# Altium PCB Arduino_MEGA_2560-Rev3.PcbDoc (part 1 of 2)
Units mil, origin at the board's own origin, x right, y up, seen from the top; angles counter-clockwise.
Board outline 4000 x 2100 mil, 2 copper layers (Top, Bottom); 63 components, 112 nets, 394 pads, 154 vias.
Unrouted connection lines stored in the file: 2.
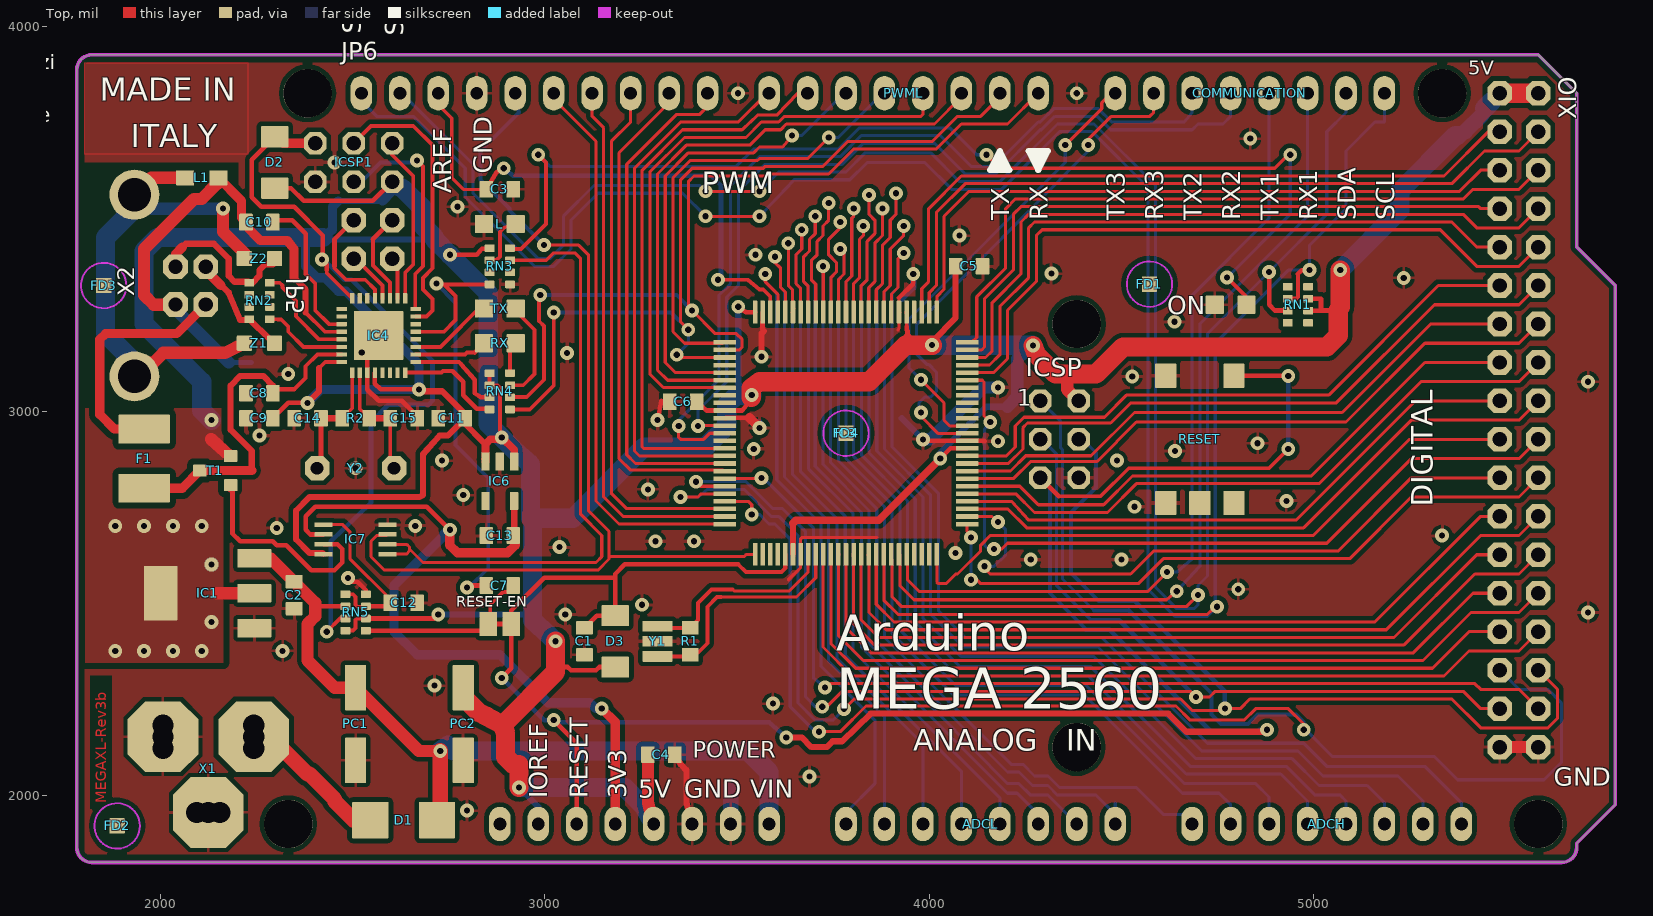
[diagram p0: Top view]
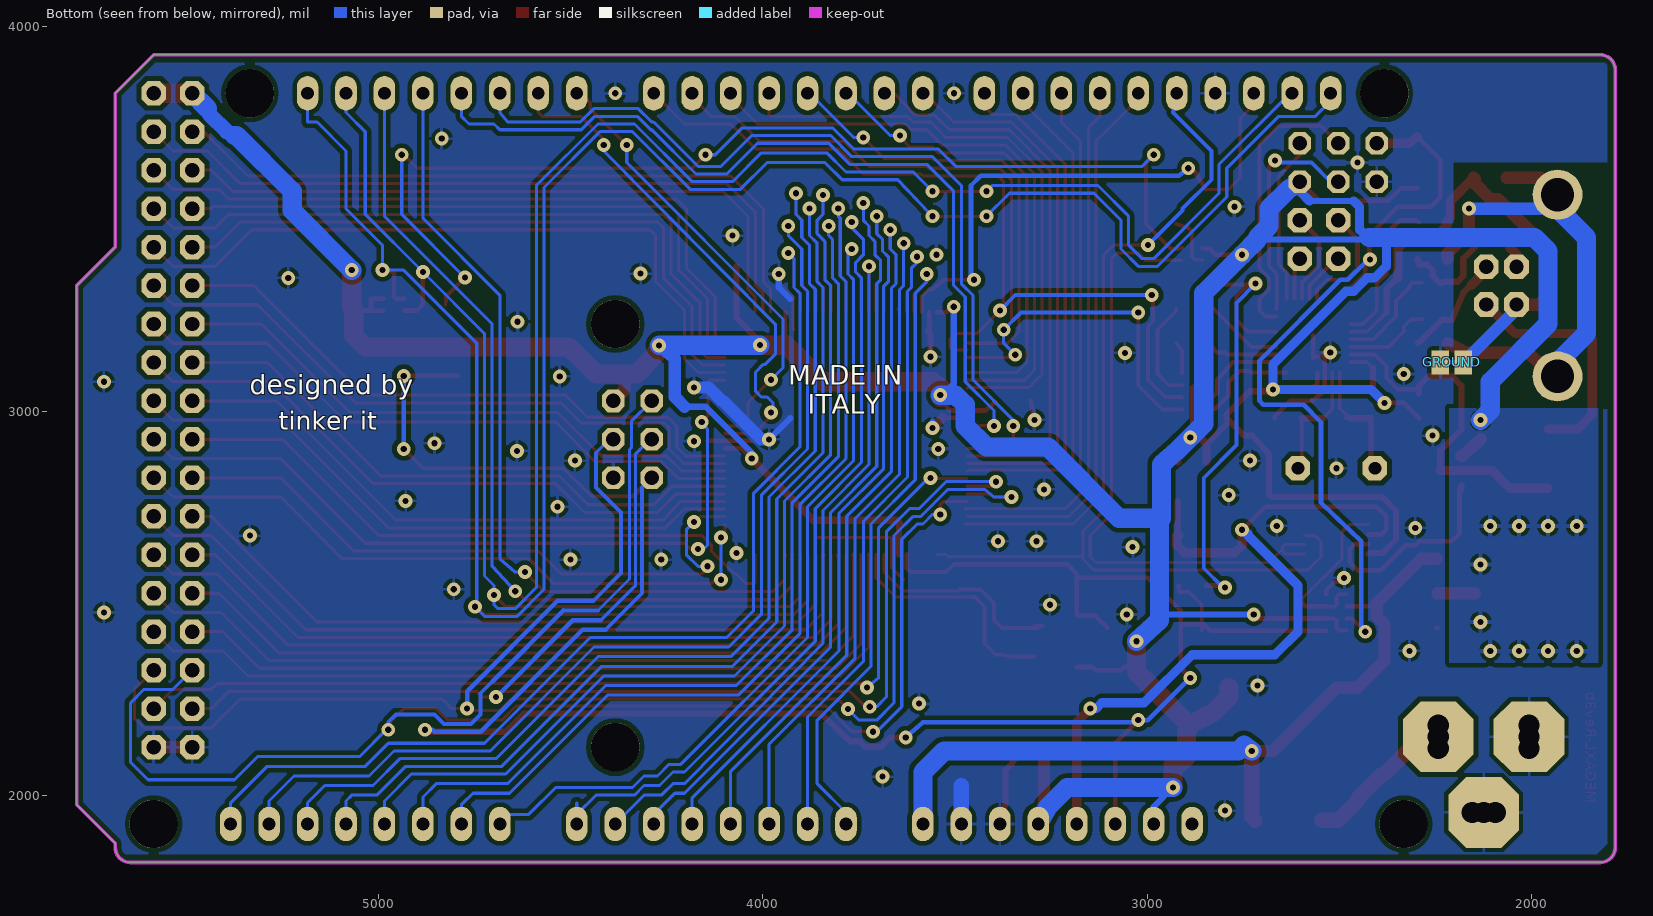
[diagram p1: Bottom view, seen from below]

## Layer stack, top to bottom
Top Solder: solder mask 0.4, Solder Resist, Dk 3.5
Top: signal copper 1.378
Dielectric 1: dielectric 12.6, FR-4, Dk 4.8
Bottom: signal copper 1.378
Bottom Solder: solder mask 0.4, Solder Resist, Dk 3.5

## Board outline
1822.83,3926.77 5583.46,3926.77 5683.46,3826.77 5683.46,3426.77 5783.46,3326.77 5783.46,1976.77 5683.46,1876.77 5683.46,1866.14 cw(c5644.09,1866.14) 5644.09,1826.77 1822.83,1826.77 cw(c1822.83,1866.14) 1783.46,1866.14 1783.46,3887.4 cw(c1822.83,3887.4)

## Design rules (kind name [scope] priority, off if disabled: settings)
Clearance Clearance_for_PolygonClass_Isolate_16 [InPolygonClass('Isolate_16')] p1: gap=0 ignorepadtopadclearanceinfootprint=FALSE except(16: Arc-Poly Track-Poly SMDPad-Poly THPad-Poly Via-Poly Fill-Poly Poly-Poly Poly-Region Poly-Text Poly-Hole)
Clearance Clearance_for_PolygonClass_Isolate_12 [InPolygonClass('Isolate_12')] p2: gap=0 ignorepadtopadclearanceinfootprint=FALSE except(12: Arc-Poly Track-Poly SMDPad-Poly THPad-Poly Via-Poly Fill-Poly Poly-Poly Poly-Region Poly-Text Poly-Hole)
Clearance "Clearance (Same Net)" [All] p3: gap=7 ignorepadtopadclearanceinfootprint=FALSE except(8: Track-Via THPad-THPad; 10: Via-Via; 12: THPad-Via)
Clearance "Clearance_for_NetClass_power usb" [InNetClass('power usb') vs InNetClass('power usb')] p4: gap=8 ignorepadtopadclearanceinfootprint=FALSE
Clearance Clearance_for_NetClass_gnd [InNetClass('gnd') vs InNetClass('gnd')] p5: gap=8 ignorepadtopadclearanceinfootprint=FALSE
Clearance Clearance_for_NetClass_power [InNetClass('power') vs InNetClass('power')] p6: gap=8 ignorepadtopadclearanceinfootprint=FALSE
Clearance [All] p7: gap=7 ignorepadtopadclearanceinfootprint=FALSE except(8: Track-Via THPad-THPad; 10: Via-Via; 12: THPad-Via)
HoleSize "HoleSize_For_NetClass_power usb" [InNetClass('power usb')] p1: absolutevalues=TRUE maxlimit=16 minlimit=16 maxpercent=80.000 minpercent=20.000
HoleSize HoleSize_For_NetClass_gnd [InNetClass('gnd')] p2: absolutevalues=TRUE maxlimit=16 minlimit=16 maxpercent=80.000 minpercent=20.000
HoleSize HoleSize_For_NetClass_power [InNetClass('power')] p3: absolutevalues=TRUE maxlimit=16 minlimit=16 maxpercent=80.000 minpercent=20.000
HoleSize [All] p4: absolutevalues=TRUE maxlimit=100000 minlimit=16 maxpercent=80.000 minpercent=20.000
HoleToHoleClearance mdDrill [All] p1: gap=12 allowstackedmicrovias=TRUE
PasteMaskExpansion Expansion_SMDPaste_OFF [InPadClass('SMDPaste_OFF')] p1: expansion=0
PasteMaskExpansion mlMinCreamFrame [All] p2: expansion=-2
PolygonConnect PolygonConnect_For_PolygonThermal_ON_Width80000_Gap100000 [InPolygonClass('PolygonThermal_ON_Width80000_Gap100000')] p1: connectstyle=Relief reliefconductorwidth=8 reliefentries=4 polygonreliefangle="90 Angle" airgapwidth=10
PolygonConnect PolygonConnect_For_PolygonThermal_ON_Width120000_Gap100000 [InPolygonClass('PolygonThermal_ON_Width120000_Gap100000')] p2: connectstyle=Relief reliefconductorwidth=12 reliefentries=4 polygonreliefangle="90 Angle" airgapwidth=10
PolygonConnect PolygonConnect_For_PolygonThermal_OFF [InPolygonClass('PolygonThermal_OFF')] p3: connectstyle=Direct reliefconductorwidth=10 reliefentries=4 polygonreliefangle="90 Angle" airgapwidth=10
PolygonConnect ThermalVias [IsVia] p4: connectstyle=Direct reliefconductorwidth=10 reliefentries=4 polygonreliefangle="90 Angle" airgapwidth=10
PolygonConnect [All] p5: connectstyle=Relief reliefconductorwidth=10 reliefentries=4 polygonreliefangle="90 Angle" airgapwidth=10
RoutingVias [All] p1: holewidth=16 width=36 viastyle="Through Hole" minholewidth=16 minwidth=36 maxholewidth=100 maxwidth=100
SolderMaskExpansion Expansion_SMDSolder_OFF [InPadClass('SMDSolder_OFF')] p1: expansion=0
SolderMaskExpansion mlMinStopFrame [All] p2: expansion=2
Width "Width_For_NetClass_power usb" [InNetClass('power usb')] p1: maxlimit=40 minlimit=10 preferedwidth=20
Width Width_For_NetClass_gnd [InNetClass('gnd')] p2: maxlimit=24 minlimit=10 preferedwidth=12
Width Width_For_NetClass_power [InNetClass('power')] p3: maxlimit=48 minlimit=10 preferedwidth=24
Width [All] p4: maxlimit=10000 minlimit=8 preferedwidth=8
27 further rules are at their usual default settings.

## Classes and differential pairs
polygon class PolygonThermal_ON_Width80000_Gap100000: Polygon_1_Net_GND Polygon_1_Net_N$1 Polygon_2_Net_GND
polygon class PolygonThermal_ON_Width120000_Gap100000: Polygon_2_Net_+5V
polygon class PolygonThermal_OFF: Polygon_1_Net_+5V
polygon class Isolate_16: Polygon_1_Net_+5V
polygon class Isolate_12: Polygon_1_Net_GND Polygon_2_Net_GND
pad class SMDSolder_OFF: IC4-33
pad class SMDPaste_OFF: IC4-33 RESET-5
net class "power usb": +5V USBVCC XVCC
net class gnd: GND UGND USHIELD
net class power: +3V3 PWRIN VIN

## Components (designator, comment, footprint, x,y, rotation, side; value= is the part's Value field where it differs from the comment)
ADCH "8x1F-H8.5" 1X08 5033.46,1926.77 r0 top
ADCL "8x1F-H8.5" 1X08 4133.46,1926.77 r0 top
C1 "22p" C0603-ROUND 3103.46,2401.77 r270 top
C2 "100n" C0603-ROUND 2348.46,2521.77 r270 top
C3 "100n" C0603-ROUND 2883.46,3576.77 r0 top
C4 "100n" C0603-ROUND 3303.46,2106.77 r0 top
C5 "100n" C0603-ROUND 4103.46,3376.77 r0 top
C6 "100n" C0603-ROUND 3360.03,3024.37 r180 top
C7 "100n" C0603-ROUND 2883.46,2546.77 r0 top
C8 "100n" C0603-ROUND 2258.46,3046.77 r180 top
C9 "100n" C0603-ROUND 2258.46,2981.77 r180 top
C10 "1u" C0603-ROUND 2258.46,3491.77 r180 top
C11 "100n" C0603-ROUND 2758.46,2981.77 r0 top
C12 "100n" C0603-ROUND 2633.46,2501.77 r180 top
C13 "1u" C0603-ROUND 2883.46,2676.77 r0 top
C14 "22p" C0603-ROUND 2383.46,2981.77 r180 top
C15 "22p" C0603-ROUND 2633.46,2981.77 r0 top
COMMUNICATION "8x1F-H8.5" 1X08 4833.46,3826.77 r180 top
D1 "M7" SMB 2633.46,1936.77 r180 top
D2 "CD1206-S01575" MINIMELF 2298.46,3646.77 r90 top
D3 "CD1206-S01575" MINIMELF 3183.46,2401.77 r90 top
F1 "MF-MSMF050-2 500mA" L1812 1958.46,2876.77 r90 top
FD1 "" FIDUCIA-MOUNT 4572.46,3330.4 r0 top
FD2 "" FIDUCIA-MOUNT 1888.46,1921.77 r0 top
FD3 "" FIDUCIA-MOUNT 1853.46,3326.77 r0 top
FD4 "" FIDUCIA-MOUNT 3783.46,2942.77 r0 top
GROUND "" SJ 2208.46,3126.77 r0 bottom
IC1 "NCP1117ST50T3G" SOT223 2123.46,2526.77 r90 top
IC3 "ATMEGA2560-16AU" TQFP100 3783.46,2942.77 r0 top
IC4 "ATMEGA16U2-MU" MLF32 2568.46,3196.77 r90 top
IC6 "LP2985-33DBVR" SOT23-DBV 2883.46,2817.77 r180 top
IC7 "LMV358IDGKR" MSOP08 2508.46,2666.77 r90 top
ICSP "3x2M" 2X03 4338.46,2926.77 r270 top
ICSP1 "3x2M" 2X03 2503.46,3646.77 r180 top
JP5 "2x2M - NM" 2X02 2553.46,3446.77 r90 top
JP6 "10x1F-H8.5" 1X10 2973.46,3826.77 r0 top
L "YELLOW" CHIP-LED0805 2883.46,3486.77 r90 top
L1 "BLM21" 0805 2108.46,3606.77 r180 top
ON "GREEN" CHIP-LED0805 4783.46,3276.77 r90 top
PC1 "47u" PANASONIC_D 2508.46,2186.77 r90 top
PC2 "47u" PANASONIC_D 2788.46,2186.77 r90 top
POWER "8x1F-H8.5" 1X08 3233.46,1926.77 r0 top
PWML "8x1F-H8.5" 1X08 3933.46,3826.77 r180 top
R1 "1M" R0603-ROUND 3378.46,2401.77 r90 top
R2 "1M" R0603-ROUND 2508.46,2981.77 r0 top
RESET "TS42031-160R-TR-7260" TS42 4703.46,2926.77 r90 top
RESET-EN "" SJ 2883.46,2446.77 r0 top
RN1 "10K" CAT16 4958.46,3276.77 r270 top
RN2 "22R" CAY16 2258.46,3286.77 r90 top
RN3 "1k" CAY16 2883.46,3376.77 r270 top
RN4 "1k" CAY16 2883.46,3051.77 r90 top
RN5 "10K" CAT16 2508.46,2476.77 r90 top
RX "YELLOW" CHIP-LED0805 2883.46,3176.77 r90 top
T1 "FDN340P" SOT-23 2143.46,2846.77 r270 top
TX "YELLOW" CHIP-LED0805 2883.46,3266.77 r90 top
U$1 "" DISCLAIMER 1000,1000 r0 top
X1 "POWERSUPPLY_DC21MMX" POWERSUPPLY_DC-21MM 1993.46,2156.77 r90 top
X2 "USB-B_TH" PN61729 1933.46,3326.77 r270 top
XIO "18x2F-H8.5" 2X18 5533.46,2976.77 r270 top
Y1 "CSTCE16M0V53-R0 16MHZ" RESONATOR 3293.46,2401.77 r270 top
Y2 "16MHz" QS 2508.46,2851.77 r180 top
Z1 "CG0603MLC-05E" CT/CN0603 2258.46,3176.77 r0 top
Z2 "CG0603MLC-05E" CT/CN0603 2258.46,3396.77 r0 top

## Footprints (in the part's own frame and the unit in brackets; to place one, negate y for a bottom-side part, rotate by r counter-clockwise, add the part's x,y. Pads: shape width x height; smd on the part's side, far side on the other; paste and mask are expansions set on the pad)
1X08 [mil] "1X08"
  oval 56x89.6 / inner round 60 / far side oval 56x89.6 hole 33.46: 1(-350,0) 2(-250,0) 3(-150,0) 4(-50,0) 5(50,0) 6(150,0) 7(250,0) 8(350,0)
1X10 [mil] "1X10"
  oval 56x89.6 / inner round 60 / far side oval 56x89.6 hole 33.46: 1(-450,0) 2(-350,0) 3(-250,0) 4(-150,0) 5(-50,0) 6(50,0) 7(150,0) 8(250,0) 9(350,0) 10(450,0)
2X02 [mil] "2X02"
  oct 63.9x63.9 / inner oct 60x60 / far side oct 63.9x63.9 hole 37.4: 1(-50,-50) 2(-50,50) 3(50,-50) 4(50,50)
2X03 [mil] "2X03"
  oct 59.08x59.08 / inner oct 60x60 / far side oct 59.08x59.08 hole 37.4: 1(-100,-50) 2(-100,50) 3(0,-50) 4(0,50) 5(100,-50) 6(100,50)
2X18 [mil] "2X18"
  oct 63.9x63.9 / inner oct 60x60 / far side oct 63.9x63.9 hole 37.4: 1(-850,-50) 2(-850,50) 3(-750,-50) 4(-750,50) 5(-650,-50) 6(-650,50) 7(-550,-50) 8(-550,50) 9(-450,-50) 10(-450,50) 11(-350,-50) 12(-350,50) 13(-250,-50) 14(-250,50) 15(-150,-50) 16(-150,50) 17(-50,-50) 18(-50,50) 19(50,-50) 20(50,50) 21(150,-50) 22(150,50) 23(250,-50) 24(250,50) 25(350,-50) 26(350,50) 27(450,-50) 28(450,50) 29(550,-50) 30(550,50) 31(650,-50) 32(650,50) 33(750,-50) 34(750,50) 35(850,-50) 36(850,50)
0805 [mm] "0805"
  rrect10% 1.2x1 smd: 1(-1.1,0) 2(1.1,0)
C0603-ROUND [mil] "C0603-ROUND"
  rrect11% 35.37x43.31 smd: 1(-35,0) 2(35,0)
CAT16 [mm] "CAT16"
  rrect20% 0.5x0.65 smd: 1(-1.2,-0.675) 2(-0.4,-0.675) 3(0.4,-0.675) 4(1.2,-0.675) 5(1.2,0.675) 6(0.4,0.675) 7(-0.4,0.675) 8(-1.2,0.675)
CAY16 [mm] "CAY16"
  rrect20% 0.5x0.65 smd: 1(-1.2,-0.675) 2(-0.4,-0.675) 3(0.4,-0.675) 4(1.2,-0.675) 5(1.2,0.675) 6(0.4,0.675) 7(-0.4,0.675) 8(-1.2,0.675)
CHIP-LED0805 [mil] "CHIP-LED0805"
  rrect8% 47.24x47.24 smd: A(0,-41.34) C(0,41.34)
CT/CN0603 [mm] "CT/CN0603"
  rrect10% 1x1 smd: 1(-1,0) 2(1,0)
DISCLAIMER [mil] "DISCLAIMER"
FIDUCIA-MOUNT [mil] "FIDUCIA-MOUNT"
  rrect10% 40x40 smd: P$1(0,0)
  Top keep-out circle w5: c0,0 r59.06
L1812 [mil] "L1812"
  rrect5% 74.8x133.86 smd: 1(-76.77,0) 2(76.77,0)
MINIMELF [mil] "MINIMELF"
  rrect7% 55.12x70.87 smd: A(66.93,0) C(-66.93,0)
MLF32 [mil] "MLF32"
  rrect20% 27.56x11.02 smd: 1(-96.46,68.9) 2(-96.46,49.21) 3(-96.46,29.53) 4(-96.46,9.84) 5(-96.46,-9.84) 6(-96.46,-29.53) 7(-96.46,-49.21) 8(-96.46,-68.9) 17(96.46,-68.9) 18(96.46,-49.21) 19(96.46,-29.53) 20(96.46,-9.84) 21(96.46,9.84) 22(96.46,29.53) 23(96.46,49.21) 24(96.46,68.9)
  rrect20% 11.02x27.56 smd: 9(-68.9,-96.46) 10(-49.21,-96.46) 11(-29.53,-96.46) 12(-9.84,-96.46) 13(9.84,-96.46) 14(29.53,-96.46) 15(49.21,-96.46) 16(68.9,-96.46) 25(68.9,96.46) 26(49.21,96.46) 27(29.53,96.46) 28(9.84,96.46) 29(-9.84,96.46) 30(-29.53,96.46) 31(-49.21,96.46) 32(-68.9,96.46)
  rrect3% 128.11x128.11 smd paste+0 mask+0: 33(0,0)
MSOP08 [mil] "MSOP08"
  rrect20% 11.81x47.24 smd: 1(-38.43,-83.19) 2(-12.83,-83.19) 3(12.76,-83.19) 4(38.35,-83.19) 5(38.35,83.15) 6(12.76,83.15) 7(-12.83,83.15) 8(-38.43,83.15)
PANASONIC_D [mm] "PANASONIC_D"
  rrect7% 3x1.4 smd: +(2.4,0) -(-2.4,0)
PN61729 [mm] "PN61729"
  oct 1.623x1.623 / inner oct 1.524x1.524 / far side oct 1.623x1.623 hole 0.95: 1(1.25,4.71) 2(-1.25,4.71) 3(-1.25,2.71) 4(1.25,2.71)
  round 3.3 / inner round 1.524 / far side round 3.3 hole 2.2: P$1(-6,0) P$2(6,0)
POWERSUPPLY_DC-21MM [mil] "POWERSUPPLY_DC-21MM"
  oct 183.97x183.97 / inner oct 60x60 / far side oct 183.97x183.97 hole 55.12: 1(-200,-132) 2(-3,-250) 3(-3,-14)
  round 82.68 / inner round 60 / far side round 82.68 hole 55.12: 4(-200,-162) 5(-200,-102) 6(-33,-14) 7(27,-14) 8(-33,-250) 9(27,-250)
QS [mil] "QS"
  oct 63.9x63.9 / inner oct 60x60 / far side oct 63.9x63.9 hole 33.46: 1(-100,0) 2(100,0)
R0603-ROUND [mil] "R0603-ROUND"
  rrect11% 35.37x43.31 smd: 1(-35,0) 2(35,0)
RESONATOR [mm] "RESONATOR"
  rrect14% 0.7x2 smd: 1(-1,0) 2(0,0) 3(1,0)
SJ [mil] "SJ"
  rrect8% 46x63 smd: 1(-30,0) 2(30,0)
SMB [mil] "SMB"
  rrect4% 94.49x94.49 smd: A(86.61,0) C(-86.61,0)
SOT23-DBV [mil] "SOT23-DBV"
  rrect18% 21.65x47.24 smd: 1(-37.4,-51.18) 2(0,-51.18) 3(37.4,-51.18) 4(37.4,51.18) 5(-37.4,51.18)
SOT223 [mil] "SOT223"
  rrect8% 48x88 smd: 1(-91,-122) 2(0,-122) 3(91,-122)
  rrect4% 141.73x86.61 smd: 4(0,122.01)
SOT-23 [mil] "SOT-23"
  rrect12% 31x35 smd: 1(1,-40) 2(-37,40) 3(39,40)
TQFP100 [mm] "TQFP100"
  rrect20% 1.5x0.3 smd: 1(-8,6) 2(-8,5.5) 3(-8,5) 4(-8,4.5) 5(-8,4) 6(-8,3.5) 7(-8,3) 8(-8,2.5) 9(-8,2) 10(-8,1.5) 11(-8,1) 12(-8,0.5) 13(-8,0) 14(-8,-0.5) 15(-8,-1) 16(-8,-1.5) 17(-8,-2) 18(-8,-2.5) 19(-8,-3) 20(-8,-3.5) 21(-8,-4) 22(-8,-4.5) 23(-8,-5) 24(-8,-5.5) 25(-8,-6) 51(8,-6) 52(8,-5.5) 53(8,-5) 54(8,-4.5) 55(8,-4) 56(8,-3.5) 57(8,-3) 58(8,-2.5) 59(8,-2) 60(8,-1.5) 61(8,-1) 62(8,-0.5) 63(8,0) 64(8,0.5) 65(8,1) 66(8,1.5) 67(8,2) 68(8,2.5) 69(8,3) 70(8,3.5) 71(8,4) 72(8,4.5) 73(8,5) 74(8,5.5) 75(8,6)
  rrect20% 0.3x1.5 smd: 26(-6,-8) 27(-5.5,-8) 28(-5,-8) 29(-4.5,-8) 30(-4,-8) 31(-3.5,-8) 32(-3,-8) 33(-2.5,-8) 34(-2,-8) 35(-1.5,-8) 36(-1,-8) 37(-0.5,-8) 38(0,-8) 39(0.5,-8) 40(1,-8) 41(1.5,-8) 42(2,-8) 43(2.5,-8) 44(3,-8) 45(3.5,-8) 46(4,-8) 47(4.5,-8) 48(5,-8) 49(5.5,-8) 50(6,-8) 76(6,8) 77(5.5,8) 78(5,8) 79(4.5,8) 80(4,8) 81(3.5,8) 82(3,8) 83(2.5,8) 84(2,8) 85(1.5,8) 86(1,8) 87(0.5,8) 88(0,8) 89(-0.5,8) 90(-1,8) 91(-1.5,8) 92(-2,8) 93(-2.5,8) 94(-3,8) 95(-3.5,8) 96(-4,8) 97(-4.5,8) 98(-5,8) 99(-5.5,8) 100(-6,8)
TS42 [mil] "TS42"
  rrect7% 62.99x55.12 smd: 1(-165.35,88.58) 2(165.35,88.58) 3(-165.35,-88.58) 4(165.35,-88.58)
  rrect7% 62.99x55.12 smd paste+0: 5(-165.35,0)

## Part data
ADCH ADCL COMMUNICATION POWER PWML: library part 1X08, PackageName=1X08
C1 C2 C3 C4 C5 C6 C7 C8 C9 C10 C11 C12 C13 C14 C15: library part C0603-ROUND, PackageName=C0603-ROUND
D1: library part SMB, PackageName=SMB
D2 D3: library part MINIMELF, PackageName=MINIMELF
F1: library part L1812, PackageName=L1812
FD1 FD2 FD3 FD4: library part FIDUCIA-MOUNT, PackageName=FIDUCIA-MOUNT
GROUND RESET-EN: library part SJ, PackageName=SJ
IC1: library part SOT223, PackageName=SOT223
IC3: library part TQFP100, PackageName=TQFP100
IC4: library part MLF32, PackageName=MLF32
IC6: library part SOT23-DBV, PackageName=SOT23-DBV
IC7: library part MSOP08, PackageName=MSOP08
ICSP ICSP1: library part 2X03, PackageName=2X03
JP5: library part 2X02, PackageName=2X02
JP6: library part 1X10, PackageName=1X10
L ON RX TX: library part CHIP-LED0805, PackageName=CHIP-LED0805
L1: library part 0805, PackageName=0805
PC1 PC2: library part PANASONIC_D, PackageName=PANASONIC_D
R1 R2: library part R0603-ROUND, PackageName=R0603-ROUND
RESET: library part TS42, PackageName=TS42
RN1 RN5: library part CAT16, PackageName=CAT16
RN2 RN3 RN4: library part CAY16, PackageName=CAY16
T1: library part SOT-23, PackageName=SOT-23
U$1: library part DISCLAIMER, PackageName=DISCLAIMER
X1: library part POWERSUPPLY_DC-21MM, PackageName=POWERSUPPLY_DC-21MM
X2: library part PN61729, PackageName=PN61729
XIO: library part 2X18, PackageName=2X18
Y1: library part RESONATOR, PackageName=RESONATOR
Y2: library part QS, PackageName=QS
Z1 Z2: library part CT/CN0603, PackageName=CT/CN0603

## Free pads (board coordinates)
  round 125.98 hole 125.98 unplated: 1(2333.46,1926.77) 1(2383.46,3826.77) 1(4383.46,2126.77) 1(4383.46,3226.77) 1(5333.46,3826.77) 1(5583.46,1926.77)

## Via types
v1: diameter 36/36 (per signal layer), hole 16, Top to Bottom, 154 vias

## Nets (pads, with @x,y where several pads share a name; then routed paths per layer and width w, separated by ;. In a path a pad name is that pad's centre, name@x,y a point inside that pad or via, vN(x,y) a via of type N, cw(c..) or ccw(c..) an arc to the next point about the centre after c; other vN are vias at no path point)
5-GND: RESET.5
8PB4: IC4.18 JP5.1 | length 119.4
  Top w10: JP5.1@2593.46,3396.77 JP5.1@2603.46,3396.77 2617.67,3382.56 IC4.18@2617.67,3293.23
8PB5: IC4.19 JP5.3 | length 242.7
  Top w10: 2553.46,3446.77 2553.46,3378.77 2597.99,3334.24 IC4.19@2597.99,3293.23
  Top w12: 2553.46,3446.77 JP5.3@2603.46,3496.77
8PB6: IC4.20 JP5.2 | length 137.5
  Top w10: JP5.2@2503.46,3396.77 2508.46,3396.77 2578.3,3326.93 IC4.20@2578.3,3293.23
8PB7: IC4.21 JP5.4 | length 297.1
  Top w10: 2453.46,3376.77 2453.46,3371.77 2483.46,3341.77 2533.46,3341.77 2558.46,3316.77 2558.46,3293.38 IC4.21@2558.62,3293.23
  Top w12: 2453.46,3376.77 2453.46,3446.77 JP5.4@2503.46,3496.77
+3V3: C13.2 IC6.5 IC7.6 POWER.4 | length 2108
  Top w12: IC7.6@2425.31,2679.53 2390.7,2679.53 2378.46,2691.77 2378.46,2726.77 2403.46,2751.77 2693.46,2751.77 v1(2753.46,2691.77)
  Top w16: C13.2@2920.86,2677.83 IC6.5@2920.86,2766.59
  Top w24: v1(2753.46,2691.77) 2753.46,2651.77 2773.46,2631.77 2903.46,2631.77 2923.46,2651.77 2923.46,2675.23 C13.2@2918.46,2676.77 C13.2@2920.86,2677.83 ; v1(3148.46,2226.77) 3183.46,2191.77 POWER.4@3183.46,1926.77
  Bottom w24: v1(2753.46,2691.77) 2738.46,2681.77 2738.46,2676.77 2608.46,2546.77 2608.46,2426.77 2668.46,2366.77 2883.46,2366.77 3008.46,2241.77 3118.46,2241.77 3133.46,2226.77 v1(3148.46,2226.77)
+5V: C4.1 C5.1 C6.1 C9.1 C11.2 D2.C D3.C IC1.2 IC1.4 IC3.10 IC3.31 IC3.61 IC3.80 IC3.100 IC4.4 IC4.32 IC6.1 IC6.3 IC7.8 ICSP1.2 ICSP.2 PC2.+ POWER.2 POWER.5 RN1.6 RN1.7 RN3.1 RN4.5 RN4.6 RN5.2 RN5.8 T1.2 XIO.1 XIO.2 | length 13606.6
  Top w10: 2413.46,3111.77 2429.56,3127.87 IC4.32@2472,3127.87 ; RN5.8@2481.89,2429.53 2501.22,2429.53 2508.46,2436.77 2508.46,2456.77 2512.71,2461.02 RN5.2@2535.03,2461.02 ; RN4.5@2856.89,3099.01 RN4.6@2856.89,3067.52 2877.71,3067.52 2883.46,3061.77 2883.46,2954.27 2885.96,2936.77 v1(2888.46,2931.77) ; IC3.80@3940.94,3257.73 3941.42,3255.73 3940.46,3254.77 3941.46,3253.77 3941.46,3220.77 ; 4053.46,2901.77 4055.09,2903.4
  Top w12: C9.1@2293.46,2981.77 2333.46,3021.77 v1(2383.46,3021.77) ; D2.C@2298.46,3579.84 2340.39,3579.84 2373.46,3546.77 2553.46,3546.77 ICSP1.2@2603.46,3596.77 ; RN5.2@2535.03,2461.02 2712.71,2461.02 v1(2723.46,2471.77) ; IC4.4@2558.62,3100.31 2558.62,3071.61 2573.46,3056.77 v1(2673.46,3056.77) ; v1(2753.46,3406.77) 2823.46,3406.77 2836.14,3421.77 RN3.1@2856.89,3424.01 ; 3028.46,2346.77 3040.39,2334.84 3060.39,2334.84 3068.46,2326.77 3133.46,2326.77 3141.53,2334.84 D3.C@3183.46,2334.84 ; C6.1@3395.03,3024.37 3421.04,3001.83 IC3.10@3468.5,3001.83 3513.52,3001.83 v1@3533.46,3026.77 ; v1(3503.46,3271.77) 3522.5,3257.73 IC3.100@3547.24,3257.73 ; 3941.46,3220.77 3941.46,3210.77 3943.46,3208.77 3943.46,3191.77 ; v1(4028.46,2876.77) 4053.46,2901.77 ; 4055.09,2903.4 IC3.61@4098.42,2903.4 ; RN1.6@4985.03,3261.02 5017.71,3261.02 5018.46,3261.77 ; RN1.7@4985.03,3292.52 5017.71,3292.52 5018.46,3291.77 5018.46,3261.77 ; 5063.46,3261.77 5018.46,3261.77
  Top w16: v1(2383.46,3021.77) 2413.46,3051.77 2413.46,3111.77 ; IC7.8@2425.31,2628.34 2421.89,2631.77 2388.46,2631.77 2353.46,2666.77 2353.46,2741.77 2388.46,2776.77 2673.46,2776.77 2683.46,2781.77 2683.46,2888.31 2726.92,2936.77 2748.46,2936.77 C11.2@2793.46,2981.77 ; v1(2673.46,3056.77) 2678.46,3051.77 2733.46,3051.77 2793.46,2991.77 C11.2@2793.46,2981.77 ; 2846.06,2914.37 2788.46,2971.97 C11.2@2793.46,2981.77 ; v1@3537.24,3035.55 3533.46,3026.77 v1(3538.46,3041.77) ; IC3.31@3645.66,2627.81 3645.66,2708.97 ; v1(4007.46,3171.77) 4007.46,3180.77 4008.46,3181.77 4068.46,3242.77 C5.1@4068.46,3376.77
  Top w20: IC6.3@2844.88,2876.77 IC6.3@2846.06,2868.95 2846.06,2914.37 2858.46,2926.77 v1@2883.46,2926.77 ; v1(2888.46,2931.77) 2920.86,2899.37 IC6.1@2920.86,2868.95 ; 3645.66,2708.97 3653.46,2716.77 3868.46,2716.77 v1(4028.46,2876.77)
  Top w24: v1@2883.46,2926.77 v1(2888.46,2931.77) ; 3943.46,3191.77 3943.46,3176.77 3948.46,3171.77
  Top w32: 2133.46,2926.77 2181.46,2883.77 T1.2@2183.46,2883.77 ; 2148.46,2526.77 IC1.2@2245.46,2526.77 ; C4.1@3268.46,2106.77 3268.46,1981.77 POWER.5@3283.46,1926.77 ; 4358.46,3096.77 4358.46,3056.77 ICSP.2@4388.46,3026.77 ; 5063.46,3196.77 5063.46,3201.77
  Top w50: PC2.+@2788.46,2281.26 2788.46,2256.77 2828.46,2216.77 2848.46,2206.77 2890.96,2184.27 ; v1(2933.46,2021.77) 2933.46,2081.77 2918.46,2081.77 2898.46,2101.77 2898.46,2161.77 2890.96,2184.27 ; v1(3028.46,2401.77) 3028.46,2346.77 3028.46,2321.77 2890.96,2184.27 ; v1@3537.24,3035.55 3537.24,3060.55 3558.46,3076.77 3843.46,3076.77 3938.46,3171.77 3948.46,3171.77 v1(4007.46,3171.77) ; v1(4269.46,3170.77) 4278.46,3146.77 4328.46,3096.77 4358.46,3096.77 4433.46,3096.77 4503.46,3166.77 5033.46,3166.77 5063.46,3196.77 ; 5063.46,3201.77 5063.46,3261.77 5068.46,3271.77 v1(5068.46,3366.77) ; XIO.1@5483.46,3826.77 XIO.2@5583.46,3826.77
  Bottom w16: 2423.46,3451.77 2438.46,3451.77 2443.46,3446.77 2708.46,3446.77 ; 2463.46,3546.77 2578.46,3546.77 ; v1(2723.46,2471.77) 2968.46,2471.77 ; v1(2933.46,2021.77) 2983.46,1971.77 POWER.2@2983.46,1926.77 ; v1(3503.46,3271.77) 3503.46,3071.77 3538.46,3036.77 v1(3538.46,3041.77) ; v1(4028.46,2876.77) 4028.46,2891.77 4148.46,3011.77 4203.46,3011.77
  Bottom w24: 2378.46,3451.77 2378.46,3376.77 2408.46,3346.77 2428.46,3346.77 2463.46,3311.77 2483.46,3311.77 2673.46,3121.77 v1(2673.46,3056.77) 2418.46,3056.77 v1(2383.46,3021.77) ; 2423.46,3451.77 2448.46,3471.77 2448.46,3531.77 2463.46,3546.77 ; 2578.46,3546.77 2603.46,3571.77 ICSP1.2@2603.46,3596.77 ; 2708.46,3446.77 2713.46,3451.77 ; v1@4268.46,3171.77 v1(4269.46,3170.77)
  Bottom w32: 4203.46,3011.77 4228.46,3036.77 4228.46,3136.77 v1(4269.46,3170.77)
  Bottom w40: 5373.46,3716.77 5393.46,3726.77 5438.46,3771.77 5443.46,3786.77
  Bottom w50: v1(2133.46,2976.77) 2108.46,3001.77 2108.46,3076.77 1958.46,3226.77 1958.46,3416.77 1993.46,3451.77 2378.46,3451.77 2423.46,3451.77 ; ICSP1.2@2603.46,3596.77 2608.46,3591.77 2633.46,3576.77 2683.46,3526.77 2683.46,3481.77 2713.46,3451.77 2713.46,3446.77 v1(2753.46,3406.77) 2853.46,3306.77 2853.46,2966.77 v1(2888.46,2931.77) 2923.46,2896.77 2963.46,2861.77 2963.46,2721.77 2968.46,2721.77 ; v1(2933.46,2021.77) 3208.46,2021.77 3258.46,1971.77 POWER.5@3283.46,1926.77 ; v1(3028.46,2401.77) 2968.46,2456.77 2968.46,2471.77 2968.46,2721.77 ; v1(3538.46,3041.77) 3498.46,3041.77 3473.46,3016.77 3473.46,2961.77 3418.46,2906.77 3258.46,2906.77 3073.46,2721.77 2968.46,2721.77 ; v1(4007.46,3171.77) v1@4268.46,3171.77 ; v1(5068.46,3366.77) 5223.46,3521.77 5223.46,3571.77 5368.46,3716.77 5373.46,3716.77 ; 5443.46,3786.77 XIO.1@5483.46,3826.77
  other v1: 1883.46,2376.77 1958.46,2376.77 2033.46,2376.77 2108.46,2376.77 2133.46,2451.77 2133.46,2601.77 1883.46,2701.77 1958.46,2701.77 2033.46,2701.77 2108.46,2701.77
ADC0: ADCL.1 IC3.97 | length 1691.8
  Top w8: v1(3573.46,3356.77) 3573.46,3336.77 3606.29,3303.94 IC3.97@3606.29,3257.73
  Bottom w8: v1(3573.46,3356.77) 3573.46,3336.77 3603.46,3306.77 3603.46,2821.77 3718.46,2706.77 3718.46,2336.77 3858.46,2196.77 3858.46,2031.77 3783.46,1956.77 ADCL.1@3783.46,1926.77
ADC1: ADCL.2 IC3.96 | length 1748.5
  Top w8: v1(3598.46,3401.77) 3598.46,3386.77 3613.46,3371.77 3613.46,3321.77 3625.98,3309.25 IC3.96@3625.98,3257.73
  Bottom w8: v1(3598.46,3401.77) 3598.46,3386.77 3613.46,3371.77 3613.46,3321.77 3623.46,3311.77 3623.46,2828.77 3737.46,2714.77 3737.46,2350.77 3883.46,2204.77 ADCL.2@3883.46,1926.77
ADC2: ADCL.3 IC3.95 | length 1844.5
  Top w8: v1(3633.46,3436.77) 3633.46,3326.77 3644.46,3315.77 3644.46,3270.77 3648.46,3266.77 3645.66,3263.97 3645.66,3258.97 IC3.95@3644.42,3257.73 ; IC3.95@3643.46,3256.77 IC3.95@3644.42,3257.73 ; IC3.95@3645.66,3257.73 IC3.95@3644.42,3257.73
  Bottom w8: v1(3633.46,3436.77) 3633.46,3326.77 3644.46,3315.77 3644.46,2835.77 3760.46,2719.77 3760.46,2356.77 3983.46,2133.77 ADCL.3@3983.46,1926.77
ADC3: ADCL.4 IC3.94 | length 1957.4
  Top w8: IC3.94@3665.35,3257.73 3665.35,3319.88 3653.46,3331.77 3653.46,3406.77 3668.46,3421.77 v1(3668.46,3471.77)
  Bottom w8: v1(3668.46,3471.77) 3668.46,3421.77 3653.46,3406.77 3653.46,3331.77 3663.46,3321.77 3665.46,3316.77 3665.46,2842.77 3781.46,2726.77 3781.46,2365.77 4083.46,2063.77 4083.46,1950.77 4087.46,1946.77 4087.46,1938.77 4083.46,1934.77 ADCL.4@4083.46,1926.77
ADC4: ADCL.5 IC3.93 | length 2073.9
  Top w8: IC3.93@3685.03,3257.73 3685.03,3325.2 3673.46,3336.77 3673.46,3401.77 3688.46,3416.77 3688.46,3446.77 3703.46,3461.77 v1(3703.46,3506.77)
  Bottom w8: v1(3703.46,3506.77) 3703.46,3461.77 3688.46,3446.77 3688.46,3416.77 3673.46,3401.77 3673.46,3336.77 3685.46,3324.77 3685.46,2850.77 3801.46,2734.77 3801.46,2376.77 4183.46,1994.77 ADCL.5@4183.46,1926.77 ADCL.5@4183.46,1922.77
ADC5: ADCL.6 IC3.92 | length 2200
  Top w8: IC3.92@3704.72,3257.73 3704.72,3330.51 3693.46,3341.77 3693.46,3391.77 3708.46,3406.77 3708.46,3441.77 3723.46,3456.77 3723.46,3481.77 3738.46,3496.77 v1(3738.46,3541.77)
  Bottom w8: v1(3738.46,3541.77) 3738.46,3496.77 3723.46,3481.77 3723.46,3456.77 3708.46,3441.77 3708.46,3406.77 3693.46,3391.77 3693.46,3341.77 3703.46,3331.77 3703.46,2856.77 3823.46,2736.77 3823.46,2386.77 4203.46,2006.77 4228.46,2006.77 4283.46,1951.77 ADCL.6@4283.46,1926.77
ADC6: ADCL.7 IC3.91 | length 1885.3
  Top w8: v1(3723.46,3376.77) 3724.4,3375.83 IC3.91@3724.4,3257.73
  Bottom w8: v1(3723.46,3376.77) 3723.46,2861.77 3843.46,2741.77 3843.46,2396.77 4203.46,2031.77 4233.46,2031.77 4263.46,2001.77 4308.46,2001.77 ADCL.7@4383.46,1926.77
ADC7: ADCL.8 IC3.90 | length 2288.7
  Top w8: IC3.90@3744.09,3257.73 3744.09,3347.4 3758.46,3361.77 3758.46,3386.77 3738.46,3406.77 3738.46,3446.77 3768.46,3476.77 v1(3768.46,3491.77)
  Bottom w8: v1(3768.46,3491.77) 3768.46,3476.77 3738.46,3446.77 3738.46,3406.77 3758.46,3386.77 3758.46,3361.77 3743.46,3346.77 3743.46,2866.77 3863.46,2746.77 3863.46,2401.77 4203.46,2061.77 4233.46,2061.77 4268.46,2026.77 4308.46,2026.77 4333.46,2001.77 4433.46,2001.77 ADCL.8@4483.46,1951.77 ; ADCL.8@4483.46,1926.77 ADCL.8@4483.46,1951.77 ; 4483.46,1981.77 ADCL.8@4483.46,1951.77
ADC8: ADCH.1 IC3.89 | length 2259.9
  Top w8: IC3.89@3763.77,3257.73 3763.78,3342.09 3778.46,3356.77 3778.46,3411.77 v1(3768.46,3421.77)
  Bottom w8: v1(3768.46,3421.77) 3778.46,3411.77 3778.46,3356.77 3763.46,3341.77 3763.46,2871.77 3883.46,2751.77 3883.46,2411.77 4213.46,2081.77 4243.46,2081.77 4273.46,2051.77 4308.46,2051.77 4338.46,2021.77 4538.46,2021.77 4608.46,1951.77 4683.46,1951.77 ADCH.1@4683.46,1926.77
ADC9: ADCH.2 IC3.88 | length 2554.6
  Top w8: IC3.88@3783.46,3257.73 3783.46,3336.77 3798.46,3351.77 3798.46,3501.77 3803.46,3506.77 v1(3803.46,3526.77)
  Bottom w8: v1(3803.46,3526.77) 3803.46,3506.77 3798.46,3501.77 3798.46,3351.77 3783.46,3336.77 3783.46,2876.77 3903.46,2756.77 3903.46,2421.77 4063.46,2261.77 4403.46,2261.77 4658.46,2006.77 4753.46,2006.77 4783.46,1976.77 ADCH.2@4783.46,1926.77
ADC10: ADCH.3 IC3.87 | length 2554.8
  Top w8: IC3.87@3803.15,3257.73 3803.15,3331.46 3818.46,3346.77 3818.46,3446.77 3828.46,3456.77 v1(3828.46,3481.77)
  Bottom w8: v1(3828.46,3481.77) 3828.46,3456.77 3818.46,3446.77 3818.46,3346.77 3803.46,3331.77 3803.46,2881.77 3923.46,2761.77 3923.46,2431.77 4068.46,2286.77 4408.46,2286.77 4663.46,2031.77 4848.46,2031.77 4883.46,1996.77 ADCH.3@4883.46,1926.77
ADC11: ADCH.4 IC3.86 | length 2803.9
  Top w8: IC3.86@3822.83,3257.73 3822.83,3326.14 3838.46,3341.77 3838.46,3441.77 3858.46,3461.77 3858.46,3496.77 3843.46,3511.77 v1(3843.46,3561.77)
  Bottom w8: v1(3843.46,3561.77) 3843.46,3511.77 3858.46,3496.77 3858.46,3461.77 3838.46,3441.77 3838.46,3341.77 3823.46,3326.77 3823.46,2886.77 3943.46,2766.77 3943.46,2441.77 4073.46,2311.77 4413.46,2311.77 4668.46,2056.77 4913.46,2056.77 4983.46,1986.77 ADCH.4@4983.46,1926.77
ADC12: ADCH.5 IC3.85 | length 2795.7
  Top w8: IC3.85@3842.52,3257.73 3842.52,3320.83 3858.46,3336.77 3858.46,3436.77 3878.46,3456.77 v1(3878.46,3526.77)
  Bottom w8: v1(3878.46,3526.77) 3878.46,3456.77 3858.46,3436.77 3858.46,3336.77 3843.46,3321.77 3843.46,2891.77 3963.46,2771.77 3963.46,2451.77 4078.46,2336.77 4418.46,2336.77 4678.46,2076.77 4928.46,2076.77 5003.46,2001.77 5068.46,2001.77 5083.46,1986.77 ADCH.5@5083.46,1926.77
ADC13: ADCH.6 IC3.84 | length 2959.5
  Top w8: IC3.84@3862.2,3257.73 3862.2,3315.51 3878.46,3331.77 3878.46,3431.77 3898.46,3451.77 3898.46,3496.77 3913.46,3511.77 v1(3913.46,3566.77)
  Bottom w8: v1(3913.46,3566.77) 3913.46,3511.77 3898.46,3496.77 3898.46,3451.77 3878.46,3431.77 3878.46,3331.77 3863.46,3316.77 3863.46,2896.77 3983.46,2776.77 3983.46,2461.77 4083.46,2361.77 4428.46,2361.77 4693.46,2096.77 4943.46,2096.77 5013.46,2026.77 5138.46,2026.77 5183.46,1981.77 ADCH.6@5183.46,1926.77
ADC14: ADCH.7 IC3.83 | length 2866.7
  Top w8: IC3.83@3881.89,3257.73 3881.89,3310.2 3898.46,3326.77 3898.46,3421.77 3933.46,3456.77 v1(3933.46,3481.77)
  Bottom w8: v1(3933.46,3481.77) 3933.46,3456.77 3898.46,3421.77 3898.46,3326.77 3883.46,3311.77 3883.46,2901.77 4003.46,2781.77 4003.46,2471.77 4088.46,2386.77 4438.46,2386.77 4708.46,2116.77 4958.46,2116.77 5023.46,2051.77 5218.46,2051.77 5283.46,1986.77 ADCH.7@5283.46,1926.77
ADC15: ADCH.8 IC3.82 | length 2781.5
  Top w8: IC3.82@3901.57,3257.73 3901.57,3304.88 3918.46,3321.77 3918.46,3396.77 v1(3933.46,3411.77)
  Bottom w8: v1(3933.46,3411.77) 3918.46,3396.77 3918.46,3321.77 3903.46,3306.77 3903.46,2906.77 4023.46,2786.77 4023.46,2481.77 4093.46,2411.77 4448.46,2411.77 4723.46,2136.77 4973.46,2136.77 5033.46,2076.77 5288.46,2076.77 5383.46,1981.77 ADCH.8@5383.46,1926.77
AREF: C3.1 IC3.98 JP6.3 | length 1434.8
  Top w8: JP6.3@2723.46,3826.77 2723.46,3796.77 2758.46,3761.77 2758.46,3606.77 2788.46,3576.77 C3.1@2848.46,3576.77
  Top w10: v1(3450.46,3341.77) 3528.46,3341.77 3558.46,3316.77 3568.46,3316.77 3586.61,3298.62 IC3.98@3586.61,3257.73
  Top w12: C3.1@2848.46,3576.77 2875,3621.77 v1(2893.46,3631.77)
  Bottom w12: v1(2893.46,3631.77) 2918.46,3611.77 3433.46,3611.77 3458.46,3586.77 3458.46,3348.77 v1(3450.46,3341.77)
CMP: C12.2 IC7.5 RN5.3 RN5.5 | length 480.7
  Top w8: IC7.5@2425.31,2705.12 2475.11,2705.12 2493.46,2686.77 2493.46,2616.77 2598.46,2511.77 C12.2@2598.46,2501.77
  Top w10: RN5.5@2481.89,2524.01 2501.22,2524.01 2508.46,2516.77 2508.46,2496.77 2513.46,2491.77 RN5.3@2534.29,2491.77
  Top w12: RN5.3@2534.29,2491.77 RN5.3@2535.03,2492.52 ; 2565.74,2492.52 RN5.3@2535.03,2492.52 ; C12.2@2598.46,2501.77 2589.21,2492.52 RN5.3@2535.03,2492.52
D+: RN2.5 X2.3 Z2.2 | length 408.9
  Top w16: 2058.46,3426.77 2066.92,3435.23 2140,3435.23 2178.46,3396.77 2178.46,3351.77 2193.46,3336.77 2229.13,3336.77 RN2.5@2231.89,3334.01 2240.7,3334.01 2258.46,3351.77 2258.46,3366.77 2273.46,3381.77 2292.83,3381.77 Z2.2@2297.83,3396.77
  Top w24: X2.3@2040.15,3375.98 2040.15,3408.46 2058.46,3426.77
D-: RN2.8 X2.2 Z1.2 | length 286.5
  Top w16: 2158.46,3326.77 2160,3326.77 2178.46,3308.31 2178.46,3306.77 2208.46,3236.77 2229.13,3236.77 RN2.8@2231.89,3239.53 2284.64,3186.77 Z1.2@2297.83,3176.77
  Top w24: X2.2@2118.89,3375.98 2119.25,3365.98 2158.46,3326.77
DTR: C7.1 IC4.13 RN3.4 | length 1283.4
  Top w10: IC4.13@2664.92,3206.61 2738.3,3206.61 2768.46,3236.77 2768.46,3299.53 2738.46,3329.53 ; v1(2718.46,3331.77) 2720.7,3329.53 2738.46,3329.53 ; RN3.4@2856.89,3329.53 2738.46,3329.53
  Top w12: v1(2798.46,2541.77) 2808.46,2546.77 C7.1@2848.46,2546.77
  Bottom w10: v1(2718.46,3331.77) 2768.46,3281.77 2768.46,2911.77 2853.46,2826.77 2853.46,2591.77 2803.46,2541.77 v1(2798.46,2541.77)
GATE_CMD: IC7.7 T1.3 | length 559.9
  Top w12: T1.3@2183.46,2807.77 2188.46,2802.77 2188.46,2681.77 2208.46,2661.77 2293.46,2661.77 2303.46,2651.77 2328.46,2651.77 2393.46,2586.77 2453.46,2586.77 2473.46,2606.77 2473.46,2641.77 2461.29,2653.94 IC7.7@2425.31,2653.94
  Top w16: T1.3@2183.46,2796.77 T1.3@2183.46,2807.77
GND: C1.2 C2.2 C3.2 C4.2 C5.2 C6.2 C8.2 C9.2 C11.1 C12.1 C13.1 C14.2 C15.2 GROUND.2 IC1.1 IC3.11 IC3.32 IC3.62 IC3.81 IC3.99 IC4.3 IC4.33 IC6.2 IC7.4 ICSP1.6 ICSP.6 JP6.4 L.C ON.C PC1.- PC2.- POWER.6 POWER.7 RESET.1 RESET.2 RN3.5 RN5.4 X1.1 X1.3 X1.4 X1.5 X1.6 X1.7 XIO.35 XIO.36 Y1.2 | length 2295
  Top w8: 3633.46,2561.77 3665.46,2593.77 IC3.32@3665.46,2627.92 ; IC3.32@3665.35,2627.81 IC3.32@3665.46,2627.92 ; 3863.46,2671.77 3668.46,2671.77 3665.46,2668.77 IC3.32@3665.46,2627.92 ; 3918.46,3211.77 3921.26,3214.57 IC3.81@3921.26,3257.73 IC3.81@3922.5,3257.73 ; 3921.26,3294.57 3921.26,3258.97 IC3.81@3922.5,3257.73 ; IC3.81@3923.46,3256.77 IC3.81@3922.5,3257.73
  Top w12: IC1.1@2245.46,2435.77 IC1.1@2248.46,2436.77 ; v1(2488.46,2566.77) 2498.46,2556.77 2513.46,2556.77 2535.03,2535.2 RN5.4@2535.03,2524.01 ; IC4.3@2538.86,3099.67 2538.86,3138.77 v1(2524.46,3152.77) ; IC4.3@2538.93,3100.31 2538.93,3056.3 2568.46,3026.77 2628.46,3026.77 2668.46,2986.77 C15.2@2668.46,2981.77 ; IC4.33@2538.93,3138.3 v1(2524.46,3152.77) ; IC4.33@2540.7,3152.77 v1(2524.46,3152.77) ; IC4.33@2568.46,3196.77 2568.46,3138.77 v1(2524.46,3152.77) ; v1(3293.46,2977.4) 3303.46,3026.77 ; IC3.11@3468.5,2982.14 3470.83,2982.14 3471.46,2982.77 3528.46,2982.77 ; 3531.46,2982.77 3528.46,2982.77 ; 3532.46,2982.77 3529.46,2982.77 3528.46,2981.77 3528.46,2982.77 ; IC3.99@3566.92,3257.73 3566.46,3212.77 3570.46,3208.77 ; 3921.26,3294.57 3958.46,3331.77 v1(3958.46,3356.77) ; v1@3990.46,2923.77 3991.46,2922.77 IC3.62@4098.74,2922.77 ; IC3.62@4099.46,2922.77 4099.15,2923.09 IC3.62@4098.42,2923.08 IC3.62@4098.74,2922.77 ; 4143.46,2921.77 4142.46,2922.77 IC3.62@4098.74,2922.77
  Top w16: C4.2@3338.46,2106.77 3353.46,2081.77 3368.46,2066.77 3368.46,1981.77 POWER.6@3383.46,1926.77 ; v1(3563.46,3141.77) 3563.46,3201.77 3570.46,3208.77 ; v1(3983.46,2926.77) 3988.46,2921.77 v1@3990.46,2923.77
  Top w24: 3532.46,2982.77 v1(3558.46,2956.77) ; v1@3983.46,2921.77 v1(3983.46,2926.77)
  Top w32: XIO.35@5483.46,2126.77 XIO.36@5583.46,2126.77
  Bottom w12: 2183.46,3126.77 GROUND.2@2238.46,3126.77
  Bottom w16: v1(3558.46,2956.77) v1@3558.46,2971.77 ; 3928.46,2981.77 v1(3983.46,2926.77) ; 3928.46,3291.77 3958.46,3321.77 v1(3958.46,3356.77)
  Bottom w32: v1(3983.46,2926.77) 4003.46,2926.77 4103.46,3026.77 4105.46,3026.77 4140.46,3061.77 v1(4178.46,3061.77) ; XIO.35@5473.46,2136.77 XIO.35@5483.46,2126.77
  Bottom w40: POWER.7@3483.46,1926.77 3483.46,2026.77
  other v1: 2798.46,1961.77 3688.46,2049.88 3593.46,2239.88 2713.46,2286.77 2318.46,2376.77 3053.46,2471.77 5712.83,2476.77 3253.46,2496.77 4803.46,2537.09 4263.78,2614.17 4500,2614.17 4068.46,2631.77 3038.46,2646.77 3288.46,2661.77 3388.46,2661.77 5333.46,2676.77 2303.46,2696.77 2663.46,2701.77 4533.46,2751.77 4928.46,2766.77 2788.46,2781.77 3268.46,2796.77 2508.46,2851.77 2733.46,2871.77 4488.46,2871.77 4638.46,2896.77 3543.46,2901.77 4853.46,2916.77 4178.46,2921.77 2258.46,2936.77 5712.83,3076.77 4527.81,3090.45 2333.46,3096.77 3058.46,3151.77 4637.46,3232.77 5233.46,3346.77 4317.46,3357.77 3548.46,3406.77 4078.46,3456.77 2773.46,3531.77 2453.46,3646.77 4834.46,3708.77 3502.83,3826.77 4383.46,3826.77
L13: IC7.1 IC7.2 RN3.7 | length 1646.8
  Top w8: IC7.1@2591.65,2628.34 2641.89,2628.34 2648.46,2636.77 2648.46,2641.77 ; IC7.2@2591.65,2653.94 2641.29,2653.94 2648.46,2646.77 2648.46,2641.77 ; RN3.7@2910.03,3392.52 3004.21,3392.52 3023.46,3411.77 3078.46,3411.77 3093.46,3396.77 3093.46,2731.77 3148.46,2676.77 3148.46,2621.77 3133.46,2606.77 2683.46,2606.77 2648.46,2641.77
M8RXD: IC4.9 RN4.7 | length 251
  Top w10: IC4.9@2664.92,3127.87 2777.36,3127.87 2783.46,3121.77 ; RN4.7@2856.14,3036.77 RN4.7@2856.89,3036.02
  Top w12: 2783.46,3121.77 2818.46,3081.77 2818.46,3046.77 2833.46,3036.77 RN4.7@2856.14,3036.77
M8TXD: IC4.8 RN4.8 | length 282.9
  Top w10: IC4.8@2637.36,3100.31 2732.11,3100.31 2736.01,3104.22 2761.01,3104.22
  Top w12: 2761.01,3104.22 2788.46,3076.77 2788.46,3041.77 2823.46,3006.77 2854.64,3006.77 RN4.8@2856.89,3004.53
MISO2: IC4.17 ICSP1.1 | length 435.1
  Top w10: ICSP1.1@2603.46,3696.77 2603.46,3666.77 2658.46,3611.77 2658.46,3381.77 2637.36,3360.67 IC4.17@2637.36,3293.23
MOSI2: IC4.16 ICSP1.4 | length 588.7
  Top w10: IC4.16@2664.92,3265.67 2664.92,3268.23 2663.46,3271.77 2663.46,3356.77 2683.46,3376.77 2683.46,3636.77 v1(2668.46,3651.77)
  Bottom w10: ICSP1.4@2503.46,3596.77 2523.46,3596.77 2573.46,3646.77 2658.46,3646.77 2663.46,3651.77 v1(2668.46,3651.77)
N$1: 
N$2: L.A RN3.2 | length 141.7
  Top w10: RN3.2@2856.89,3392.52 2876.22,3394.53 2883.46,3401.77 2883.46,3466.77 2893.46,3476.77 L.A@2924.8,3486.77